# Altium PCB DONGLE02.PcbDoc
Units mm, origin at the board's own origin, x right, y up, seen from the top; angles counter-clockwise.
Board outline 38.14 x 16.59 mm, 2 copper layers (Top Layer, Bottom Layer), stack 1.061 mm thick; 14 components, 18 nets, 47 pads, 8 vias.
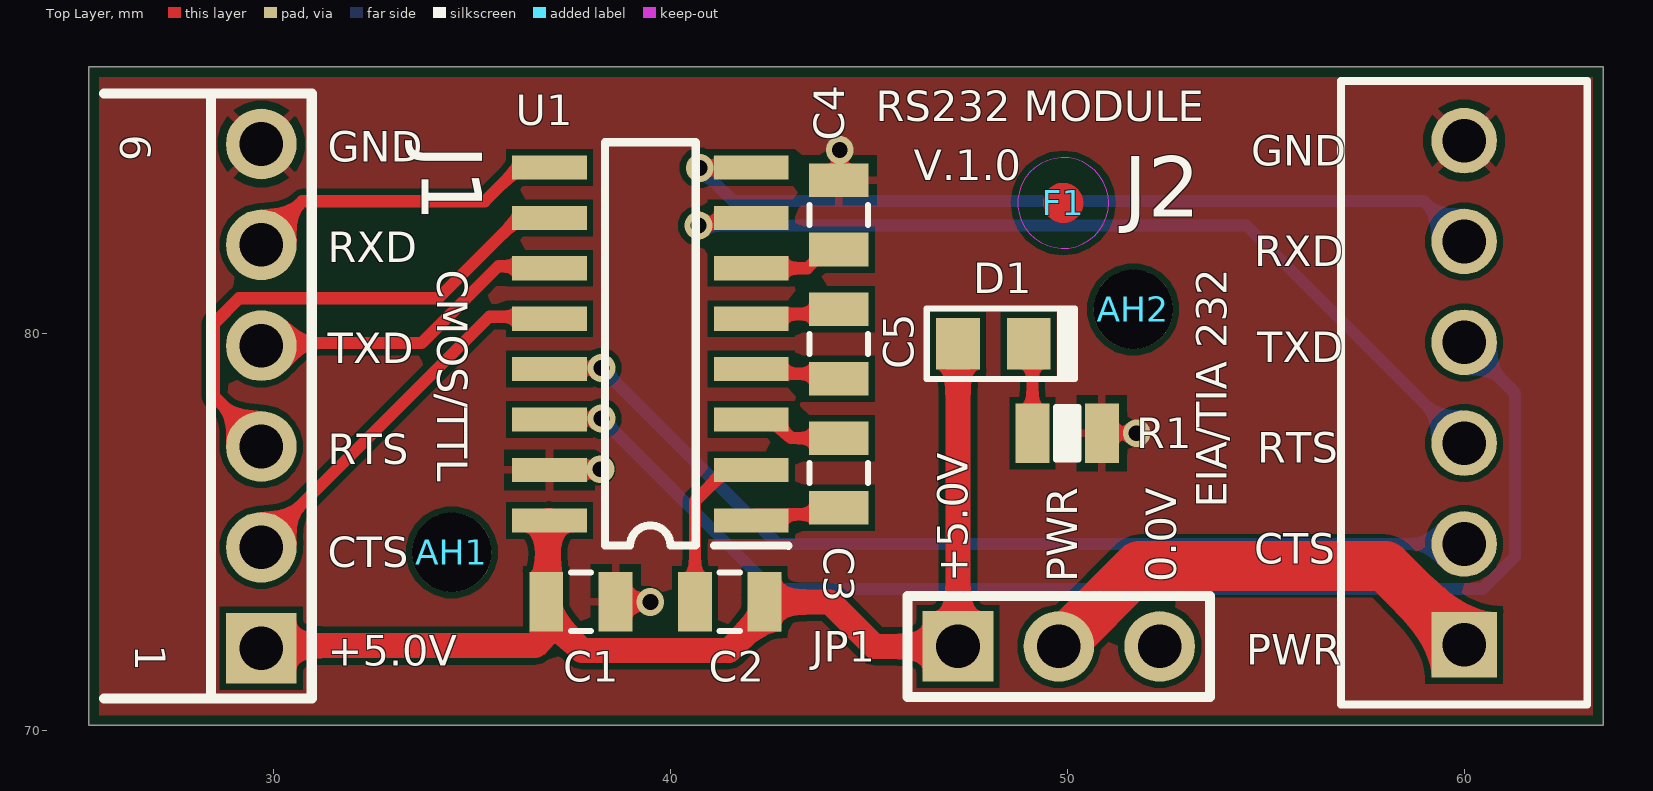
[diagram p0: Top Layer view]
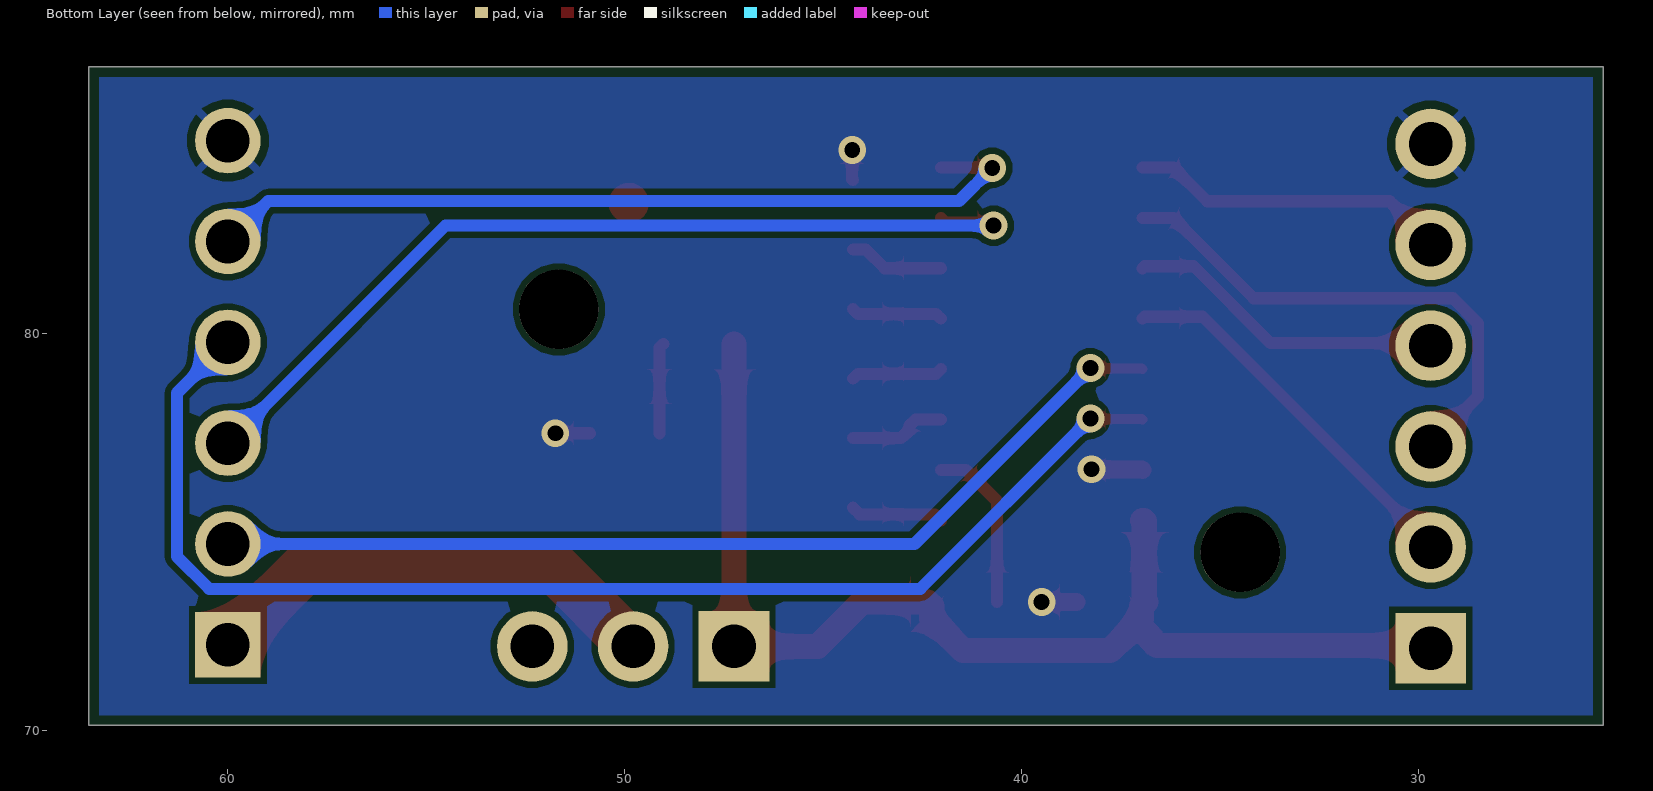
[diagram p1: Bottom Layer view, seen from below]
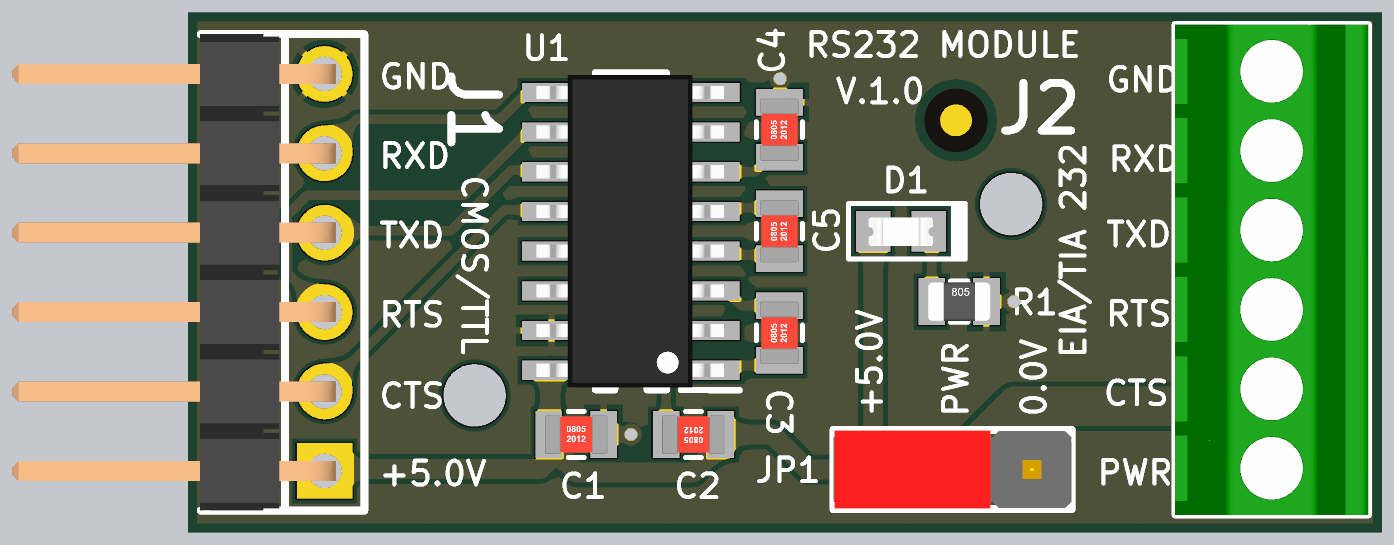
[diagram p2: 3D render of the assembled board from above, using the file's embedded part models]

## Layer stack, top to bottom
Top Solder: solder mask 0.0254, SM-001, Dk 4
Top Layer: signal copper 0.035
Dielectric 1: core 0.9906, Core-042, Dk 4.6
Bottom Layer: signal copper 0.035
Bottom Solder: solder mask 0.0254, SM-001, Dk 4

## Board outline
25.357,70.142 63.5,70.142 63.5,86.728 25.357,86.728

## Design rules (kind name [scope] priority, off if disabled: settings)
BoardOutlineClearance [All] p1: gap=0.254 ignorepadtopadclearanceinfootprint=FALSE except(0: Arc-SplitContinuation Track-SplitContinuation SMDPad-SplitContinuation THPad-SplitContinuation Via-SplitContinuation Fill-SplitContinuation Poly-SplitContinuation Region-SplitContinuation Text-SplitContinuation)
Clearance [All] p1: gap=0.152 ignorepadtopadclearanceinfootprint=TRUE
PolygonConnect [All] p1: thpad.connectstyle=Relief thpad.reliefconductorwidth=0.203 thpad.reliefentries=4 thpad.polygonreliefangle="90 Angle" thpad.airgapwidth=0.203 thpad.conductorbypadedge=TRUE thpad.mindistance=0.381 thpad.enablemindistance=FALSE smdpad.connectstyle=Relief smdpad.reliefconductorwidth=0.203 smdpad.reliefentries=4 smdpad.polygonreliefangle="90 Angle" smdpad.airgapwidth=0.203 smdpad.conductorbypadedge=TRUE smdpad.mindistance=0.381 smdpad.enablemindistance=FALSE via.connectstyle=Direct via.reliefconductorwidth=0.203 via.reliefentries=4 via.polygonreliefangle="90 Angle" via.airgapwidth=0.203
RoutingVias [All] p1: holewidth=0.711 width=1.27 viastyle="Through Hole" minholewidth=0.711 minwidth=1.27 maxholewidth=0.711 maxwidth=1.27 useviatemplates=TRUE viatemplateguid#1={9099A8C9-6F9B-4F98-8F80-C86D27A5C1E5} viatemplatename#1=v70h40
SilkToSilkClearance [All] p1: silktosilkclearance=0.127
SilkToSolderMaskClearance [IsPad] p1: minsilkscreentomaskgap=0.09 clearancetoexposedcopper=TRUE
SolderMaskExpansion Via [IsVia] p1: expansion=0.102 istentingtop=TRUE
SolderMaskExpansion Generic [All] p2: expansion=0.051 istentingtop=FALSE
SupplyNets "Schematic Supply Nets_3" [InNet('+5.0V')] p1: voltage=0.000
SupplyNets "Schematic Supply Nets_2" [InNet('GND')] p2: voltage=0.000
UnRoutedNet [All] p1: checkbadconnections=TRUE
Width [All] p1: maxlimit=1.27 minlimit=0.254 preferedwidth=0.305
27 further rules are at their usual default settings.

## Components (designator, comment, footprint, x,y, rotation, side; value= is the part's Value field where it differs from the comment)
AH1 "Furo de Alinhamento" AH_2.0MMD 34.5,74.5 r0 top
AH2 "Furo de Alinhamento" AH_2.0MMD 51.664,80.62 r0 top
C1 "0.1uF" C0805 37.75,73.25 r90 top
C2 "0.33uF" C0805 41.5,73.25 r270 top
C3 "0.047uF" C0805 44.25,76.5 r180 top
C4 "0.33uF" C0805 44.25,83 r180 top
C5 "0.33uF" C0805 44.25,79.75 r180 top
D1 "Blue Led 0805" "LED 0805" 48.139,79.75 r180 top
F1 "" FIDUCIAL 49.9,83.3 r0 top
J1 "Header 6" BERG-M-6V-H-INV 29.7,84.785 r270 top value="1x6 0.1\" Right Angle Pin Header"
J2 "MPT 0,5/ 6-2,54" 1725698 60,72.17 r90 top
JP1 "Header 3 Pin" JMP-3-PTH-180 49.79,72.13 r0 top
R1 "180R" R0805 50,77.5 r90 top
U1 "2/2 RS232 400kbps" SOIC16N 39.5,79.75 r180 top

## Footprints (in the part's own frame and the unit in brackets; to place one, negate y for a bottom-side part, rotate by r counter-clockwise, add the part's x,y. Pads: shape width x height; smd on the part's side, far side on the other; paste and mask are expansions set on the pad)
1725698 [mm]
  rect 1.65x1.65 hole 1.1: 1(0,0)
  round 1.65 hole 1.1: 2(2.54,0) 3(5.08,0) 4(7.62,0) 5(10.16,0) 6(12.7,0)
  silkscreen extent -1.5,-3.1 14.2,3.1, body extent -1.5,-3.1 14.2,3.1, height 8.61
AH_2.0MMD [mm] "Alignment Hole M2"
  round 2 hole 2 unplated: 1(0,0)
BERG-M-6V-H-INV [mil] "Conector Barra Pinos 6 vias 90º passo 0.1\""
  rect 70x70 hole 43.31: 1(500,0)
  round 70 hole 43.31: 2(400,0) 3(300,0) 4(200,0) 5(100,0) 6(0,0)
  silkscreen extent -50,-156 550,50, body extent -50,-393 550,15, height 103
C0805 [mm]
  rect 1.5x0.85 smd mask+0.05: 1(0,0.875) 2(0,-0.875)
  silkscreen extent -0.74,-0.25 0.74,0.25, body extent -0.62,-1 0.63,1, height 0.9
FIDUCIAL [mm] "Alvo Optico"
  Top Layer circle w0.508: c0,0 r0.254
  Top Layer pour cut-out: -1.143,0 -1.133,-0.149 -1.104,-0.296 -1.056,-0.437 -0.99,-0.572 -0.907,-0.696 -0.808,-0.808 -0.696,-0.907 -0.572,-0.99 -0.437,-1.056 -0.296,-1.104 -0.149,-1.133 0,-1.143 0.149,-1.133 0.296,-1.104 0.437,-1.056 0.572,-0.99 0.696,-0.907 0.808,-0.808 0.907,-0.696 0.99,-0.572 1.056,-0.437 1.104,-0.296 1.133,-0.149 1.143,0 1.133,0.149 1.104,0.296 1.056,0.437 0.99,0.572 0.907,0.696 0.808,0.808 0.696,0.907 0.572,0.99 0.437,1.056 0.296,1.104 0.149,1.133 0,1.143 -0.149,1.133 -0.296,1.104 -0.437,1.056 -0.572,0.99 -0.696,0.907 -0.808,0.808 -0.907,0.696 -0.99,0.572 -1.056,0.437 -1.104,0.296 -1.133,0.149
  Top Layer keep-out circle w0.025: c0,0 r1.143
JMP-3-PTH-180 [mil] "Jumper 3 pinos PTH 180º passo 2.54mm"
  rect 70x70 hole 43.31: 1(-100,0)
  round 70 hole 43.31: 2(0,0) 3(100,0)
  silkscreen extent -150,-50 150,50, body extent -150,-49 150,49, height 323
"LED 0805" [mm]
  rect 1.1x1.3 smd mask+0.051: A(0.889,0) K(-0.889,0)
  silkscreen extent -2.06,-0.89 1.68,0.89, body extent -1.03,-0.44 1.03,0.47, height 0.85
R0805 [mm]
  rect 1.5x0.85 smd mask+0.05: 1(0,0.875) 2(0,-0.875)
  silkscreen extent -0.66,-0.28 0.66,0.28, body extent -0.62,-1 0.63,1, height 0.78
SOIC16N [mil] "16 Pin SOIC Narrow (9,90x3,90)"
  rect 74x24 smd: 1(-100,175) 2(-100,125) 3(-100,75) 4(-100,25) 5(-100,-25) 6(-100,-75) 7(-100,-125) 8(-100,-175) 9(100,-175) 10(100,-125) 11(100,-75) 12(100,-25) 13(100,25) 14(100,75) 15(100,125) 16(100,175)
  silkscreen extent -137,-200 45,200, body extent -117,-197 119,197, height 69

## Part data
AH1 AH2: library part "Aligment Hole M2", RefDes=RefDes, Supplier=Digikey
C1: library part CAP, "0.1 µF ±10% 100V Ceramic Capacitor X7R 0805 (2012 Metric)", Manufacturer="Murata Electronics", Manufacturer P/N=GCM21BR72A104KA37L, Datasheet Web=https://search.murata.co.jp/Ceramy/image/img/A01X/G101/ENG/GCM033R71A103KA03-01A.pdf, Info=MLCC, RefDes=RefDes, Supplier=Digikey, Supplier P/N (Cut Tape)=490-4789-1-ND, Supplier P/N (Tape & Reel)=490-4789-2-ND, Supplier Web=https://www.digikey.com/en/products/detail/murata-electronics/GCM21BR72A104KA37L/1641663?s=N4IgTCBcDaIOIGECyYCMAhASgdjAQVQAYAWAaTwGZsAZEAXQF8g
C2 C4 C5: library part CAP, "0.33 µF ±5% 25V Ceramic Capacitor X7R 0805 (2012 Metric)", Manufacturer=KEMET, Manufacturer P/N=C0805C334J3RECAUTO7210, Datasheet Web=https://content.kemet.com/datasheets/KEM_C1090_X7R_ESD.pdf, Info=MLCC, RefDes=RefDes, Supplier=Digikey, Supplier P/N (Cut Tape)=399-C0805C334J3RECAUTO7210CT-ND, Supplier P/N (Tape & Reel)=399-C0805C334J3RECAUTO7210TR-ND, Supplier Web=https://www.digikey.com/en/products/detail/kemet/C0805C334J3RECAUTO7210/8647991
C3: library part CAP, "0.047 µF ±5% 25V Ceramic Capacitor X7R 0805 (2012 Metric)", Manufacturer="KYOCERA AVX", Manufacturer P/N=KGM21NR71E473JT, Datasheet Web=https://datasheets.kyocera-avx.com/KGM_X7R.pdf, Info=MLCC, RefDes=RefDes, Supplier=Digikey, Supplier P/N (Cut Tape)=478-KGM21NR71E473JTCT-ND, Supplier P/N (Tape & Reel)=478-KGM21NR71E473JTTR-ND, Supplier Web=https://www.digikey.com/en/products/detail/kyocera-avx/KGM21NR71E473JT/1602247
D1: library part "LED GREEN 0805", "Blue 470nm LED Indication - Discrete 3.2V 0805 (2012 Metric)", Manufacturer="Würth Elektronik", Manufacturer P/N=150080BS75000, Datasheet Web=https://www.we-online.com/components/products/datasheet/150080BS75000.pdf, Info="Id = 0.5 Inom (10mA)", RefDes=RefDes, Supplier=Digikey, Supplier P/N (Cut Tape)=732-4982-1-ND, Supplier P/N (Tape & Reel)=732-4982-2-ND, Supplier Web=https://www.digikey.com/en/products/detail/w%C3%BCrth-elektronik/150080BS75000/4489912
F1: library part FIDUCIAL, "FIDUCIAL MARK", RefDes=rRefDes, Supplier=Digikey
J1: "Connector Header Through Hole, Right Angle 6 position 0.100\" (2.54mm)", Manufacturer="Adam Tech", Manufacturer P/N=PH1RB-06-UA, Datasheet Web=https://app.adam-tech.com/products/download/data_sheet/201281/ph1rb-xx-ua-data-sheet.pdf, Info="CONN HEADER R/A 6POS 2.54MM", RefDes=RefDes, Supplier=Digikey, Supplier P/N (Cut Tape)=2057-PH1RB-06-UA-ND, Supplier P/N (Tape & Reel)=2057-PH1RB-06-UA-ND, Supplier Web=https://www.digikey.com/en/products/detail/adam-tech/PH1RB-06-UA/9830592
J2: library part 691322110006, "6 Position Wire to Board Terminal Block Horizontal with Board 0.100\" (2.54mm) Through Hole", Manufacturer="Phoenix Contact", Manufacturer P/N=1725698, Datasheet Web=https://www.phoenixcontact.com/en-us/products/printed-circuit-board-terminal-mpt-05-6-254-1725698?type=pdf, Info="Borne 6pos 6A e=2,54", RefDes=RefDes, Supplier=Digikey, Supplier P/N (Cut Tape)=277-1277-ND, Supplier P/N (Tape & Reel)=277-1277-ND, Supplier Web=https://www.digikey.com/en/products/detail/phoenix-contact/1725698/267466
JP1: library part "Jumper 3", "3 Pin Jumper", Manufacturer="Würth Elektronik", Manufacturer P/N=61300311121, Datasheet Web=https://www.we-online.com/components/products/datasheet/61300311121.pdf, Info="0.1\" Pin header 1x3", RefDes=RefDes, Supplier=Digikey, Supplier P/N (Cut Tape)=732-5316-ND, Supplier P/N (Tape & Reel)=732-5316-ND, Supplier Web=https://www.digikey.com/en/products/detail/w%C3%BCrth-elektronik/61300311121/4846825
R1: library part RESISTOR, "180 Ohms ±1% 0.25W, 1/4W Chip Resistor 0805 (2012 Metric) Anti-Sulfur Thin Film", Manufacturer="Stackpole Electronics Inc", Manufacturer P/N=RNCP0805FTD180R, Datasheet Web=https://www.seielect.com/catalog/sei-rncp.pdf, Info="1% 100 PPM", RefDes=RefDes, Supplier=Digikey, Supplier P/N (Cut Tape)=RNCP0805FTD180RCT-ND, Supplier P/N (Tape & Reel)=RNCP0805FTD180RTR-ND, Supplier Web=https://www.digikey.com/en/products/detail/stackpole-electronics-inc/RNCP0805FTD180R/2240212
U1: library part "CI SMD ST3232CDR-SO16", "2/2 Transceiver Full RS232 16-SO", Manufacturer=STMicroelectronics, Manufacturer P/N=ST3232CDR, Datasheet Web=https://www.st.com/content/ccc/resource/technical/document/datasheet/group1/40/2c/7f/62/3a/3f/47/3c/CD00002253/files/CD00002253.pdf/jcr:content/translations/en.CD00002253.pdf, Info=ST3232CDR, RefDes=RefDes, Supplier=Digikey, Supplier P/N (Cut Tape)=497-3731-1-ND, Supplier P/N (Tape & Reel)=497-3731-2-ND, Supplier Web=https://www.digikey.com/en/products/detail/stmicroelectronics/ST3232CDR/686410?s=N4IgTCBcDaIMoBUDMYUGEAiAlEBdAvkA

## Via types
v1: diameter 0.7, hole 0.4, Top Layer to Bottom Layer, tented both sides, 8 vias

## Nets (pads, with @x,y where several pads share a name; then routed paths per layer and width w, separated by ;. In a path a pad name is that pad's centre, name@x,y a point inside that pad or via, vN(x,y) a via of type N, cw(c..) or ccw(c..) an arc to the next point about the centre after c; other vN are vias at no path point)
+5.0V: C1.1 C2.1 D1.A J1.1 JP1.1 U1.16 | length 29.6
  Top Layer w0.635: J1.1@29.7,72.15 36.6,72.15 C1.1@37.125,72.675 ; U1.16 36.93,75.305 36.918,75.292 36.918,73.293 C1.1 36.983,73.143 36.983,72.817 C1.1@37.125,72.675 ; C2.1@42.375,73.143 42.483,73.25 44.021,73.25 45.141,72.13 JP1.1 D1.A ; C2.1 42.267,73.143 42.267,72.817 41.48,72.03 37.77,72.03 C1.1@37.125,72.675
CTS: J1.2 U1.12 | length 9.7
  Top Layer w0.305: J1.2@29.7,74.69 35.445,80.435 36.91,80.435 U1.12
GND: C1.2 C4.2 J1.6 J2.6 R1.2 U1.15 | length 3.8
  Top Layer w0.305: C4.2 44.272,83.897 v1(44.272,84.633) ; R1.2 v1(51.75,77.5)
  Top Layer w0.457: U1.15 36.969,76.584 38.236,76.584 v1(38.246,76.594) ; C1.2 v1(39.5,73.25)
NetC2_2: C2.2 U1.2 | length 4.3
  Top Layer w0.305: C2.2 40.625,75.795 41.405,76.575 U1.2
NetC3_1: C3.1 U1.1 | length 2.3
  Top Layer w0.305: U1.1 42.192,75.457 44.082,75.457 C3.1
NetC3_2: C3.2 U1.3 | length 2.5
  Top Layer w0.305: U1.3 42.675,77.845 42.827,77.693 42.827,77.59 43.043,77.375 C3.2
NetC4_1: C4.1 U1.6 | length 2.4
  Top Layer w0.305: U1.6 43.455,81.655 43.925,82.125 C4.1
NetC5_1: C5.1 U1.4 | length 2.3
  Top Layer w0.305: U1.4 42.16,78.995 44.13,78.995 C5.1
NetC5_2: C5.2 U1.5 | length 2.3
  Top Layer w0.305: U1.5 42.16,80.505 44.13,80.505 C5.2
NetD1_K: D1.K R1.1 | length 2.3
  Top Layer w0.305: D1.K 49.125,79.653 R1.1
NetJ2_1: J2.1 JP1.2 | length 11.9
  Top Layer w1.27: JP1.2 51.816,74.156 58.014,74.156 J2.1
RS232.CTS: J2.2 U1.13 | length 24.9
  Top Layer w0.254: U1.13 36.974,79.129 38.256,79.129 v1(38.271,79.144)
  Bottom Layer w0.305: v1(38.271,79.144) 42.704,74.71 J2.2
RS232.RTS: J2.3 U1.7 | length 23
  Top Layer w0.305: v1(40.71,82.729) 40.786,82.805 41.92,82.805 U1.7
  Bottom Layer w0.305: v1(40.71,82.729) 54.521,82.729 J2.3
RS232.RXD: J2.5 U1.8 | length 21.3
  Top Layer w0.305: v1(40.744,84.184) 40.75,84.19 42.035,84.19 U1.8
  Bottom Layer w0.305: v1(40.744,84.184) 41.581,83.348 58.982,83.348 J2.5
RS232.TXD: J2.4 U1.14 | length 32.4
  Top Layer w0.254: U1.14 36.972,77.857 38.259,77.857 v1(38.271,77.869)
  Bottom Layer w0.305: v1(38.271,77.869) 42.559,73.58 60.468,73.58 61.278,74.39 61.278,78.512 J2.4
RTS: J1.3 U1.10 | length 13.1
  Top Layer w0.305: J1.3@29.7,77.23 28.506,78.424 28.506,80.264 29.141,80.899 34.156,80.899 36.183,82.925 U1.10
RXD: J1.5 U1.9 | length 8
  Top Layer w0.305: J1.5@29.7,82.31 30.732,83.342 35.33,83.342 36.183,84.195 U1.9
TXD: J1.4 U1.11 | length 8.1
  Top Layer w0.305: J1.4@29.7,79.77 33.735,79.77 35.67,81.705 36.91,81.705 U1.11
pads on no net: AH1.1 AH2.1 JP1.3

## Polygon pours and split planes (outlines as drawn)
GND on Top Layer "GND_L01_P000" (solid, remove dead copper, pour order 0): 25.357,70.142 63.5,70.142 63.5,86.728 25.357,86.728
GND on Bottom Layer "GND_L02_P001" (solid, remove dead copper, pour order 1): 25.357,70.142 63.5,70.142 63.5,86.728 25.357,86.728

## Silkscreen, mask and mechanical layers (free items; w line width, h text height)
Top Overlay:
  text "RS232 MODULE" at 45.177,85.355 h0.76
  text "GND" at 31.377,84.342 h0.76
  text "GND" at 54.63,84.243 h0.76
  text "V.1.0" at 46.138,83.869 h0.76
  text "RXD" at 31.377,81.802 h0.76
  text "RXD" at 54.71,81.703 h0.76
  text "CMOS/TTL" at 34.127,81.623 h0.76 r270
  text "TXD" at 54.79,79.29 h0.76
  text "TXD" at 31.377,79.262 h0.76
  text "RTS" at 54.79,76.75 h0.76
  text "RTS" at 31.377,76.722 h0.76
  text "EIA/TIA 232" at 54.014,75.627 h0.76 r90
  text "CTS" at 54.71,74.21 h0.76
  text "CTS" at 31.377,74.127 h0.76
  text "PWR" at 54.511,71.67 h0.76
  text "+5.0V" at 31.377,71.642 h0.76
Board:
  the board outline again, w0.051

## Dimensions
63.5,70.142 to 25.357,70.142 on Board
63.5,70.142 to 63.5,86.728 on Board

## Text inside footprints (layer, text, board x,y; h text height)
J1: Top Overlay "1" at 26.525,72.176 h0.76 r270; Top Overlay "6" at 26.144,85.021 h0.76 r270
JP1: Top Overlay "+5.0V" at 47.5,73.75 h0.76 r90; Top Overlay "0.0V" at 52.75,73.75 h0.76 r90; Top Overlay "PWR" at 50.25,73.75 h0.76 r90